# Altium PCB Twintig-FCC-Host.PcbDoc
Units mm, origin at the board's own origin, x right, y up, seen from the top; angles counter-clockwise.
Board outline 30 x 10 mm, 2 copper layers (Top Copper, Bottom Copper), stack 0.32 mm thick; 2 components, 26 nets, 56 pads, 26 vias.
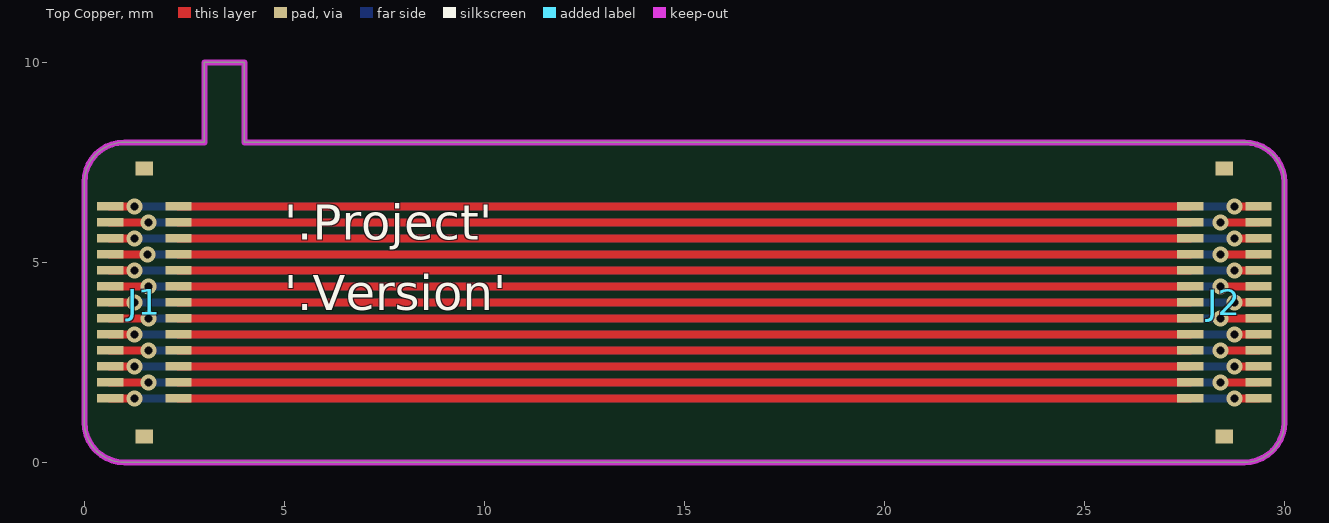
[diagram p0: Top Copper view]
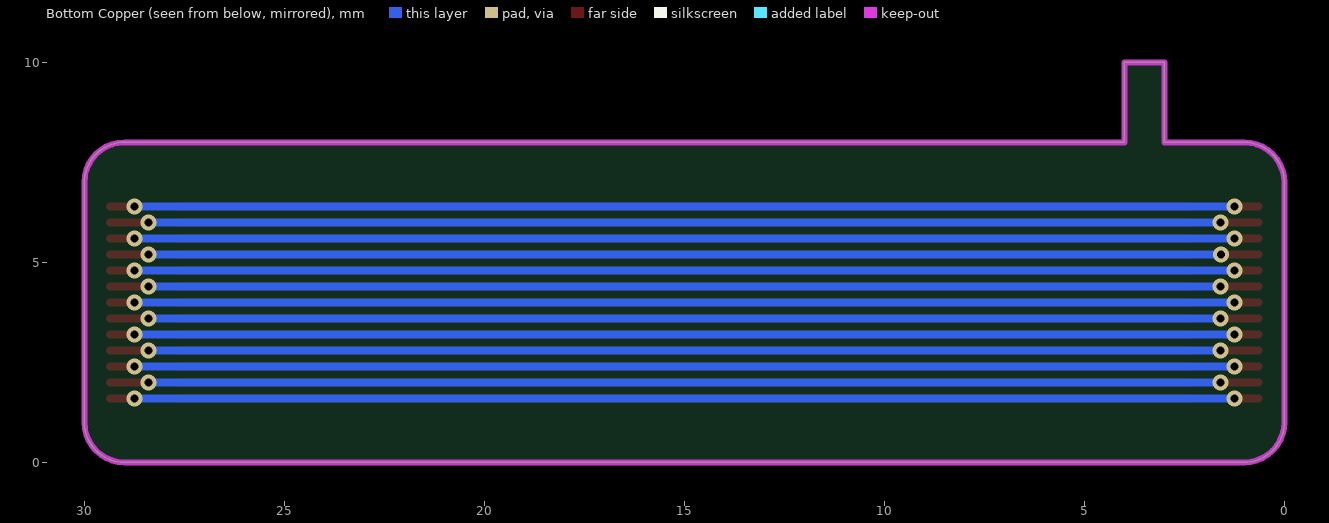
[diagram p1: Bottom Copper view, seen from below]

## Layer stack, top to bottom
Top Coverlay: solder mask 0.0125, FC-001, Dk 4
Top Adhesive: prepreg 0.015, PP-006, Dk 4.1
Top Copper: signal copper 0.035
Polyimide: core 0.025, Core-009, Dk 4.5
Bottom Copper: signal copper 0.035
Bottom Adhesive: prepreg 0.015, PP-006, Dk 4.1
Bottom Coverlay: solder mask 0.0125, FC-001, Dk 4
Stiffener: core 0.195, Core-009, Dk 4.5

## Board outline
3,0 29,0 ccw(c29,1) 30,1 30,7 ccw(c29,7) 29,8 4,8 4,10 3,10 3,8 1,8 ccw(c1,7) 0,7 0,1 ccw(c1,1) 1,0
board region "Layer Stack Region 1": 1,0 3,0 3,8 1,8 0.902,8 0.708,7.962 0.526,7.886 0.363,7.777 0.223,7.637 0.114,7.474 0.038,7.292 0,7.098 0,7 0,1 0,0.902 0.038,0.708 0.114,0.526 0.223,0.363 0.363,0.223 0.526,0.114 0.708,0.038 0.902,0
board region "Layer Stack Region 2": 29,0 29.098,0 29.292,0.038 29.474,0.114 29.637,0.223 29.777,0.363 29.886,0.526 29.962,0.708 30,0.902 30,1 30,7 30,7.098 29.962,7.292 29.886,7.474 29.777,7.637 29.637,7.777 29.474,7.886 29.292,7.962 29.098,8 29,8 27,8 27,0
board region "Default Layer Stack Region": 3,0 27,0 27,8 4,8 4,10 3,10 3,8

## Design rules (kind name [scope] priority, off if disabled: settings)
Clearance [All] p1: gap=0.1 ignorepadtopadclearanceinfootprint=FALSE except(0: Arc-Hole Track-Hole SMDPad-Hole THPad-Hole Via-Hole Fill-Hole Poly-Hole Region-Hole Text-Hole)
DiffPairsRouting [All] p1: maxlimit=0.254 minlimit=0.1 mostfreqgap=0.1 substack1={F553CA46-867E-4DA4-8D37-035A658C01F8} toplayer_{f553ca46-867e-4da4-8d37-035a658c01f8}_minwidth=0.381 toplayer_{f553ca46-867e-4da4-8d37-035a658c01f8}_maxwidth=0.381 toplayer_{f553ca46-867e-4da4-8d37-035a658c01f8}_prefwidth=0.381 bottomlayer_{f553ca46-867e-4da4-8d37-035a658c01f8}_minwidth=0.381 bottomlayer_{f553ca46-867e-4da4-8d37-035a658c01f8}_maxwidth=0.381 bottomlayer_{f553ca46-867e-4da4-8d37-035a658c01f8}_prefwidth=0.381 toplayer_minwidth=0.1 toplayer_maxwidth=0.381 toplayer_prefwidth=0.1 bottomlayer_minwidth=0.1 bottomlayer_maxwidth=0.381 bottomlayer_prefwidth=0.1 maxuncoupledlength=12.7
HoleSize [All] p1: absolutevalues=TRUE maxlimit=10 minlimit=0.025 maxpercent=80.000 minpercent=20.000
MinimumSolderMaskSliver [All] p1: minsoldermaskwidth=0
PlaneClearance [All] p1: clearance=0.2
PlaneConnect [All] p1: planeconnectstyle=Direct reliefexpansion=0.508 reliefentries=4 reliefconductorwidth=0.254 reliefairgap=0.254
PolygonConnect [All] p1: thpad.connectstyle=Relief thpad.reliefconductorwidth=0.254 thpad.reliefentries=4 thpad.polygonreliefangle="90 Angle" thpad.airgapwidth=0.1 smdpad.connectstyle=Relief smdpad.reliefconductorwidth=0.254 smdpad.reliefentries=4 smdpad.polygonreliefangle="90 Angle" smdpad.airgapwidth=0.1 via.connectstyle=Direct via.reliefconductorwidth=0.254 via.reliefentries=4 via.polygonreliefangle="90 Angle" via.airgapwidth=0.254
RoutingVias [All] p1: holewidth=0.711 width=1.27 viastyle="Through Hole" minholewidth=0.15 minwidth=0.35 maxholewidth=0.711 maxwidth=1.27
SilkToSolderMaskClearance [IsPad] p1: minsilkscreentomaskgap=0.1 clearancetoexposedcopper=TRUE
SolderMaskExpansion [All] p1: expansion=0.102 istentingtop=FALSE
Width [All] p1: maxlimit=1 minlimit=0.05 preferedwidth=0.1 substack1={F553CA46-867E-4DA4-8D37-035A658C01F8}
24 further rules are at their usual default settings.

## Components (designator, comment, footprint, x,y, rotation, side; value= is the part's Value field where it differs from the comment)
J1 "Molex 502430-2630" "MOLEX 502430-2630" 1.5,4 r270 top
J2 "Molex 502430-2630" "MOLEX 502430-2630" 28.5,4 r270 top

## Footprints (in the part's own frame and the unit in brackets; to place one, negate y for a bottom-side part, rotate by r counter-clockwise, add the part's x,y. Pads: shape width x height; smd on the part's side, far side on the other; paste and mask are expansions set on the pad)
"MOLEX 502430-2630" [mm]
  rect 0.22x0.66 smd: 1(-2.4,-0.855) 2(-2,-0.855) 3(-1.6,-0.855) 4(-1.2,-0.855) 5(-0.8,-0.855) 6(-0.4,-0.855) 7(0,-0.855) 8(0.4,-0.855) 9(0.8,-0.855) 10(1.2,-0.855) 11(1.6,-0.855) 12(2,-0.855) 13(2.4,-0.855) 14(-2.4,0.855) 15(-2,0.855) 16(-1.6,0.855) 17(-1.2,0.855) 18(-0.8,0.855) 19(-0.4,0.855) 20(0,0.855) 21(0.4,0.855) 22(0.8,0.855) 23(1.2,0.855) 24(1.6,0.855) 25(2,0.855) 26(2.4,0.855)
  rect 0.35x0.44 smd: "Fitting Nail"(-3.35,0) "Fitting Nail"(3.35,0)
  body extent -3.73,-1.04 3.73,1.04, height 0.78

## Via types
v1: diameter 0.4, hole 0.2, Top Copper to Bottom Copper, tented both sides, 26 vias

## Nets (pads, with @x,y where several pads share a name; then routed paths per layer and width w, separated by ;. In a path a pad name is that pad's centre, name@x,y a point inside that pad or via, vN(x,y) a via of type N, cw(c..) or ccw(c..) an arc to the next point about the centre after c; other vN are vias at no path point)
1: J1.1 J2.14 | length 28.7
  Top Copper w0.2: J1.1 v1(1.25,6.4) ; v1(28.75,6.4) J2.14
  Bottom Copper w0.2: v1(1.25,6.4) v1(28.75,6.4)
2: J1.2 J2.15 | length 28.7
  Top Copper w0.2: J1.2 v1(1.6,6) ; v1(28.4,6) J2.15
  Bottom Copper w0.2: v1(1.6,6) v1(28.4,6)
3: J1.3 J2.16 | length 28.7
  Top Copper w0.2: J1.3 v1(1.25,5.6) ; v1(28.75,5.6) J2.16
  Bottom Copper w0.2: v1(1.25,5.6) v1(28.75,5.6)
4: J1.4 J2.17 | length 28.7
  Top Copper w0.2: J1.4 v1(1.578,5.2) ; v1(28.4,5.2) J2.17
  Bottom Copper w0.2: v1(1.578,5.2) v1(28.4,5.2)
5: J1.5 J2.18 | length 28.7
  Top Copper w0.2: J1.5 v1(1.25,4.8) ; v1(28.75,4.8) J2.18
  Bottom Copper w0.2: v1(1.25,4.8) v1(28.75,4.8)
6: J1.6 J2.19 | length 28.7
  Top Copper w0.2: J1.6 v1(1.6,4.4) ; v1(28.4,4.4) J2.19
  Bottom Copper w0.2: v1(1.6,4.4) v1(28.4,4.4)
7: J1.7 J2.20 | length 28.7
  Top Copper w0.2: J1.7 v1(1.25,4) ; v1(28.75,4) J2.20
  Bottom Copper w0.2: v1(1.25,4) v1(28.75,4)
8: J1.8 J2.21 | length 28.7
  Top Copper w0.2: J1.8 v1(1.6,3.6) ; v1(28.4,3.6) J2.21
  Bottom Copper w0.2: v1(1.6,3.6) v1(28.4,3.6)
9: J1.9 J2.22 | length 28.7
  Top Copper w0.2: J1.9 v1(1.25,3.2) ; v1(28.75,3.2) J2.22
  Bottom Copper w0.2: v1(1.25,3.2) v1(28.75,3.2)
10: J1.10 J2.23 | length 28.7
  Top Copper w0.2: J1.10 v1(1.6,2.8) ; v1(28.4,2.8) J2.23
  Bottom Copper w0.2: v1(1.6,2.8) v1(28.4,2.8)
11: J1.11 J2.24 | length 28.7
  Top Copper w0.2: J1.11 v1(1.25,2.4) ; v1(28.75,2.4) J2.24
  Bottom Copper w0.2: v1(1.25,2.4) v1(28.75,2.4)
12: J1.12 J2.25 | length 28.7
  Top Copper w0.2: J1.12 v1(1.6,2) ; v1(28.4,2) J2.25
  Bottom Copper w0.2: v1(1.6,2) v1(28.4,2)
13: J1.13 J2.26 | length 28.7
  Top Copper w0.2: J1.13 v1(1.25,1.6) ; v1(28.75,1.6) J2.26
  Bottom Copper w0.2: v1(1.25,1.6) v1(28.75,1.6)
14: J1.14 J2.1 | length 25.3
  Top Copper w0.2: J1.14 J2.1
15: J1.15 J2.2 | length 25.3
  Top Copper w0.2: J1.15 J2.2
16: J1.16 J2.3 | length 25.3
  Top Copper w0.2: J1.16 J2.3
17: J1.17 J2.4 | length 25.3
  Top Copper w0.2: J1.17 J2.4
18: J1.18 J2.5 | length 25.3
  Top Copper w0.2: J1.18 J2.5
19: J1.19 J2.6 | length 25.3
  Top Copper w0.2: J1.19 J2.6
20: J1.20 J2.7 | length 25.3
  Top Copper w0.2: J1.20 J2.7
21: J1.21 J2.8 | length 25.3
  Top Copper w0.2: J1.21 J2.8
22: J1.22 J2.9 | length 25.3
  Top Copper w0.2: J1.22 J2.9
23: J1.23 J2.10 | length 25.3
  Top Copper w0.2: J1.23 J2.10
24: J1.24 J2.11 | length 25.3
  Top Copper w0.2: J1.24 J2.11
25: J1.25 J2.12 | length 25.3
  Top Copper w0.2: J1.25 J2.12
26: J1.26 J2.13 | length 25.3
  Top Copper w0.2: J1.26 J2.13
pads on no net: "J1.Fitting Nail" "J2.Fitting Nail"

## Polygon pours and split planes (outlines as drawn)
no net on Mechanical 1 "NONET_L-01_P-001" (solid): 1,0 cw(c1,1) 0,1 0,7 cw(c1,7) 1,8 3,8 3,0
no net on Mechanical 1 "NONET_L-01_P-001" (solid): 29,8 cw(c29,7) 30,7 30,1 cw(c29,1) 29,0 27,0 27,8
no net on Layer0 "Default Coverlay 1 Top" (split plane): 27,8 27,0 29.116,0 29.306,0.038 29.484,0.112 29.645,0.219 29.781,0.355 29.888,0.516 29.962,0.694 30,0.884 30,0.98 30,7.02 30,7.116 29.962,7.306 29.888,7.484 29.781,7.645 29.645,7.781 29.484,7.888 29.306,7.962 29.116,8
no net on Layer0 "Default Coverlay 1 Top" (split plane): 1.002,0 3,0 3,8 1.002,8 0.904,8 0.71,7.961 0.528,7.886 0.363,7.776 0.224,7.637 0.114,7.472 0.039,7.29 0,7.096 0,0.904 0.039,0.71 0.114,0.528 0.224,0.363 0.363,0.224 0.528,0.114 0.71,0.039 0.904,0 1.002,0
no net on Layer0 "Default Coverlay 1 Bottom" (split plane): 27,8 27,0 29.116,0 29.306,0.038 29.484,0.112 29.645,0.219 29.781,0.355 29.888,0.516 29.962,0.694 30,0.884 30,0.98 30,7.02 30,7.116 29.962,7.306 29.888,7.484 29.781,7.645 29.645,7.781 29.484,7.888 29.306,7.962 29.116,8
no net on Layer0 "Default Coverlay 1 Bottom" (split plane): 1.002,0 3,0 3,8 1.002,8 0.904,8 0.71,7.961 0.528,7.886 0.363,7.776 0.224,7.637 0.114,7.472 0.039,7.29 0,7.096 0,0.904 0.039,0.71 0.114,0.528 0.224,0.363 0.363,0.224 0.528,0.114 0.71,0.039 0.904,0 1.002,0
no net on Layer0 "Default Coverlay 2 Top" (split plane): 3,0 27,0 27,8 4,8 4,10 3,10
no net on Layer0 "Default Coverlay 2 Bottom" (split plane): 3,0 27,0 27,8 4,8 4,10 3,10

## Keep-outs
Keep-Out Layer:
  lines w0.15: 0,1 ccw(c1,1) 1,0 29,0 ccw(c29,1) 30,1 30,7 ccw(c29,7) 29,8 4,8 4,10 3,10 3,8 1,8 ccw(c1,7) 0,7 0,1

## Silkscreen, mask and mechanical layers (free items; w line width, h text height)
Top Overlay:
  text "'.Project'" at 5,5.282 h1.5
  text "'.Version'" at 5,3.517 h1.5